# EAGLE board CC2541_Breakout_Board (EAGLE 6.1)
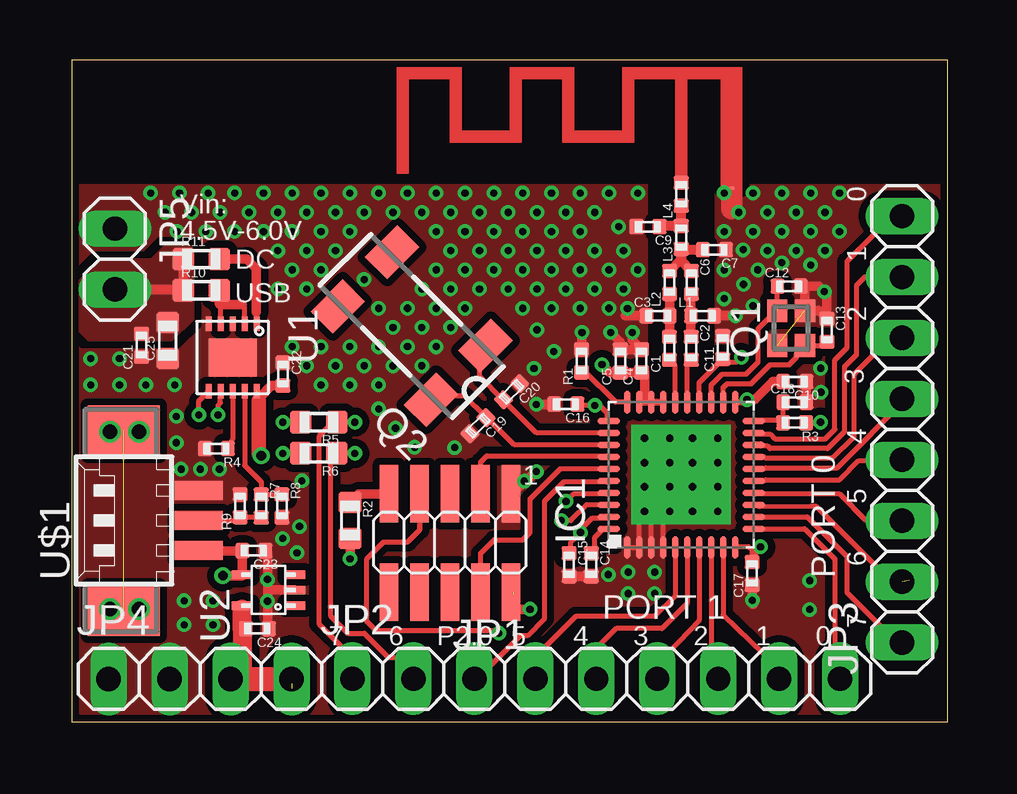
[diagram p0: board, top side]
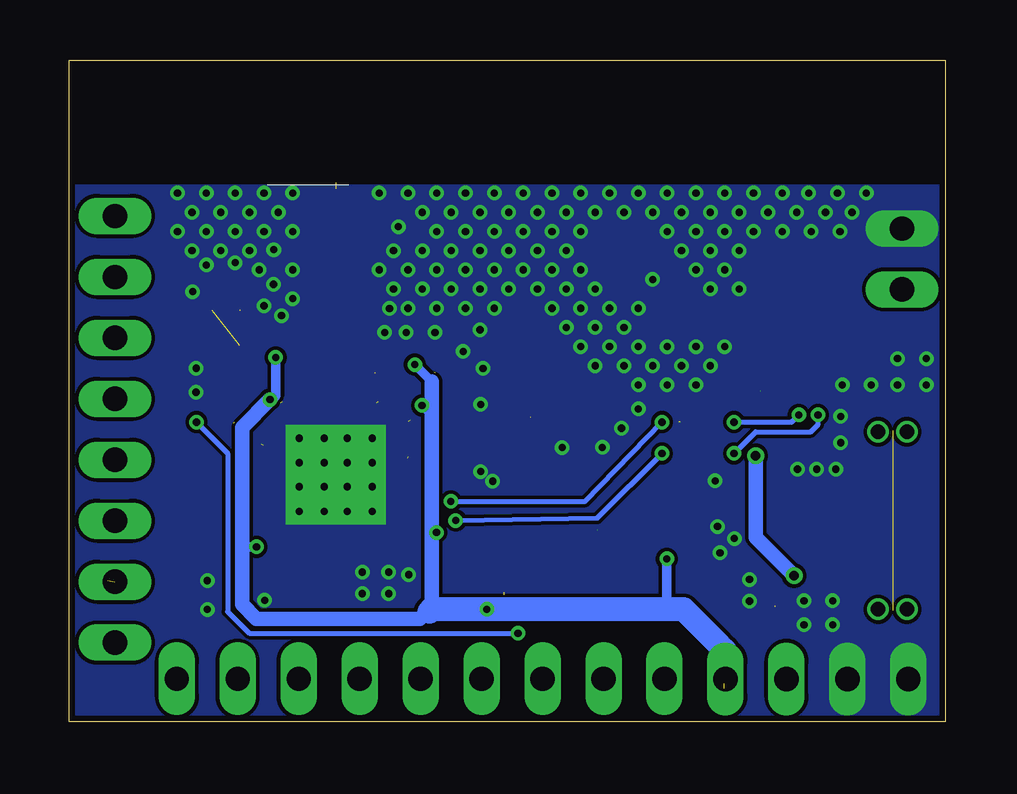
[diagram p1: board, bottom side, seen from below]

Size 36.5 x 27.6 mm. Coordinates in mm from the lower left corner, seen from the top.
Outline: 0,0 36.5,0 36.5,27.6 0,27.6 0,0
Copper layers (1*16): Top 0.035mm / dielectric 1.5mm / Bottom 0.035mm
Design rules: minimum track width 6mil, minimum drill 0.3mm, track to track 6mil, track to pad 6mil, pad to pad 6mil, via to via 6mil, smd to smd 0mil, copper to edge 10mil, drill to drill 10mil, minimum pad ring 10mil, minimum via ring 6mil, stop-mask expansion 2mil, vias tented up to drill 100mil, thermal gap 10mil

## Footprints (pad centres in the part's own frame; a part is rotated, then mirrored left to right if it is on the bottom)
TI_2.4GHZ_MIFA_LEFT = smd 0.2 x 0.1: FEED 0,-0.06; GND 2.1,-0.06
C0402 = smd 0.59 x 0.64: 1 -0.48,0; 2 0.48,0
C0603 = smd 0.9 x 0.95: 1 -0.75,0; 2 0.75,0
QFN40-6X6 = smd 0.95 x 0.28: 1 -3.025,2.25; 2 -3.025,1.75; 3 -3.025,1.25; 4 -3.025,0.75; 5 -3.025,0.25; 6 -3.025,-0.25; 7 -3.025,-0.75; 8 -3.025,-1.25; 9 -3.025,-1.75; 10 -3.025,-2.25; 21 3.025,-2.25; 22 3.025,-1.75; 23 3.025,-1.25; 24 3.025,-0.75; 25 3.025,-0.25; 26 3.025,0.25; 27 3.025,0.75; 28 3.025,1.25; 29 3.025,1.75; 30 3.025,2.25 | smd 0.28 x 0.95: 11 -2.25,-3.025; 12 -1.75,-3.025; 13 -1.25,-3.025; 14 -0.75,-3.025; 15 -0.25,-3.025; 16 0.25,-3.025; 17 0.75,-3.025; 18 1.25,-3.025; 19 1.75,-3.025; 20 2.25,-3.025; 31 2.25,3.025; 32 1.75,3.025; 33 1.25,3.025; 34 0.75,3.025; 35 0.25,3.025; 36 -0.25,3.025; 37 -0.75,3.025; 38 -1.25,3.025; 39 -1.75,3.025; 40 -2.25,3.025 | drill 0.3 pad 1.1 square: EXP@1 -1.525,1.525; EXP@2 -0.5,1.525; EXP@3 0.5,1.525; EXP@4 1.525,1.525; EXP@5 -1.525,0.475; EXP@6 -0.5,0.475; EXP@7 0.5,0.475; EXP@8 1.525,0.475; EXP@9 -1.525,-0.475; EXP@10 -0.5,-0.475; EXP@11 0.5,-0.475; EXP@12 1.525,-0.475; EXP@13 -1.525,-1.525; EXP@14 -0.5,-1.525; EXP@15 0.5,-1.525; EXP@16 1.525,-1.525
2X05_1.27_SMD = smd 0.76 x 2.4: 1 -2.54,-2.05; 2 -2.54,2.05; 3 -1.27,-2.05; 4 -1.27,2.05; 5 0,-2.05; 6 0,2.05; 7 1.27,-2.05; 8 1.27,2.05; 9 2.54,-2.05; 10 2.54,2.05
1X09 = drill 1.016 long: 1 -10.16,0; 2 -7.62,0; 3 -5.08,0; 4 -2.54,0; 5 0,0; 6 2.54,0; 7 5.08,0; 8 7.62,0; 9 10.16,0
1X08 = drill 1.016 long: 1 -8.89,0; 2 -6.35,0; 3 -3.81,0; 4 -1.27,0; 5 1.27,0; 6 3.81,0; 7 6.35,0; 8 8.89,0
1X04 = drill 1.016 long: 1 -3.81,0; 2 -1.27,0; 3 1.27,0; 4 3.81,0
1X02 = drill 1.016 long: 1 -1.27,0; 2 1.27,0
FA-128 = smd 0.95 x 0.85: 1 -0.725,-0.575; 2 0.725,-0.575; 3 0.725,0.575; 4 -0.725,0.575
MC-306 = smd 1.3 x 1.9: 1 -2.75,-1.6; 2 2.75,-1.6; 3 2.75,1.6; 4 -2.75,1.6
LLP10 = smd 0.25 x 0.6: 1 -1,-1.4; 2 -0.5,-1.4; 3 0,-1.4; 4 0.5,-1.4; 5 1,-1.4; 6 1,1.4; 7 0.5,1.4; 8 0,1.4; 9 -0.5,1.4; 10 -1,1.4 | smd 2 x 1.6: EXP 0,0
SC70 = smd 0.35 x 0.85: 1 -0.65,-1.1; 2 0,-1.1; 3 0.65,-1.1; 4 0.65,1.1; 5 -0.65,1.1
53261-03 = smd 0.8 x 2: 1 1.25,-2.5; 2 0,-2.5; 3 -1.25,-2.5 | smd 2.1 x 3: S1 3.75,0.625; S2 -3.75,0.625

## Placement (x,y rotation side)
A1  TI_2.4GHZ_MIFALEFT  [TI_2.4GHZ_MIFA_LEFT]  25.4,22.3 0 top
C1  18p  [C0402]  24.91,15.58 90 top
C2  18p  [C0402]  25.82,15.58 270 top
C3  1p  [C0402]  24.43,16.93 0 top
C4  220p  [C0402]  23.75,15.05 90 top
C5  100n  [C0402]  22.86,15.05 90 top
C6  1p  [C0402]  25.82,18.32 270 top
C7  DNM  [C0402]  26.78,19.69 180 top
C9  1p  [C0402]  24.01,20.65 180 top
C10  100n  [C0402]  30.13,14.19 180 top
C11  100n  [C0402]  27.13,15.61 90 top
C12  12p  [C0402]  29.89,18.17 0 top
C13  12p  [C0402]  31.47,16.33 270 top
C14  1u  [C0402]  21.65,6.55 270 top
C15  1u  [C0402]  20.73,6.55 270 top
C16  100n  [C0402]  20.59,13.25 180 top
C17  C0402  [C0402]  28.35,6.19 90 top
C18  100n  [C0402]  30.13,13.33 0 top
C19  15p  [C0402]  16.93,12.35 225 top
C20  15p  [C0402]  18.33,13.77 225 top
C21  4.7u  [C0402]  2.91,15.71 90 top
C22  1u  [C0402]  8.8,14.5 270 top
C23  100n  [C0402]  7.59,7.14 180 top
C24  470n  [C0402]  7.74,3.88 180 top
C25  C0603  [C0603]  4,15.9 90 top
IC1  CC2540  [QFN40-6X6]  25.39,10.3 90 top
JP1  [2X05_1.27_SMD]  15.77,7.46 180 top
JP2  [1X09]  21.86,1.8 0 top
JP3  [1X08]  34.6,12.2 90 top
JP4  [1X04]  5.35,1.79 0 top
JP5  [1X02]  1.8,19.3 270 top
L1  2n  [C0402]  26.29,16.93 0 top
L2  2n  [C0402]  24.91,18.32 90 top
L3  1n  [C0402]  25.4,20.2 90 top
L4  3n  [C0402]  25.4,22 90 top
Q1  FA-128  [FA-128]  29.98,16.42 90 top
Q2  MC-306  [MC-306]  14.16,16.51 135 top
R1  56k  [C0402]  21.25,15.05 90 top
R2  R0603  [C0603]  11.6,8.4 270 top
R3  2.7k  [C0402]  30.12,12.47 180 top
R4  ?  [C0402]  6.03,11.39 180 top
R5  R0603  [C0603]  10.3,12.5 180 top
R6  R0603  [C0603]  10.3,11.2 180 top
R7  0  [C0402]  7.9,9 270 top
R8  10k  [C0402]  8.76,9 270 top
R9  10k  [C0402]  7.02,9.01 90 top
R10  R0603  [C0603]  5.4,18 0 top
R11  R0603  [C0603]  5.4,19.3 0 top
U1  LM3658  [LLP10]  6.71,15.2 180 top
U2  TPS71530  [SC70]  8.2,5.5 90 top
U$1  53261-0371  [53261-03]  2.8,8.4 90 top

## Library data of the parts
A1 = antennas
C1-C7 C9-C25 L1-L4 R1-R11 = smd-ipc
IC1 U2 = texas
JP1-JP5 = pinhead
Q1 = crystal
Q2 = crystal; MPN: MC-306 60.0KHZ 100PPM ,12.5PF; OC_FARNELL: 1278040; OC_NEWARK: 31M5576
U1 = national-semiconductor
U$1 = con-molex

## Nets
CONNECTOR_MOUNT: U$1.S1 U$1.S2
GND: A1.GND C3.1 C4.2 C5.2 C7.1 C9.2 C10.1 C11.2 C12.2 C13.1 C14.2 C15.2 C16.2 C17.1 C18.2 C19.2 C20.1 C21.1 C22.1 C23.1 C24.1 C25.1 IC1.1 IC1.2 IC1.3 IC1.4 IC1.EXP@1 IC1.EXP@2 IC1.EXP@3 IC1.EXP@4 IC1.EXP@5 IC1.EXP@6 IC1.EXP@7 IC1.EXP@8 IC1.EXP@9 IC1.EXP@10 IC1.EXP@11 IC1.EXP@12 IC1.EXP@13 IC1.EXP@14 IC1.EXP@15 IC1.EXP@16 JP1.1 JP4.1 JP4.2 JP5.1 L1.2 Q1.2 Q1.4 R1.2 R4.2 R8.2 R9.2 U1.3 U1.5 U1.EXP U2.2 U$1.1
N$1: C1.1 IC1.26
N$2: C2.2 IC1.25
N$3: C1.2 C3.2 L2.1
N$4: C2.1 C6.2 L1.1
N$5: C6.1 C7.2 L2.2 L3.1
N$6: C9.1 L3.2 L4.1
N$7: IC1.30 R1.1
N$8: C13.2 IC1.22 Q1.1
N$9: C12.1 IC1.23 Q1.3
N$10: C14.1 IC1.40
N$11: JP1.7 R3.1
N$12: JP1.9 R2.1
N$13: IC1.34 JP1.3
N$14: IC1.35 JP1.4
N$15: C18.1 IC1.20 R3.2
N$16: C20.2 IC1.32 Q2.1
N$17: C19.1 IC1.33 Q2.4
N$18: IC1.19 JP3.8
N$19: IC1.18 JP3.7
N$20: IC1.17 JP3.6
N$21: IC1.16 JP3.5
N$22: IC1.15 JP3.4
N$23: IC1.14 JP3.3
N$24: IC1.13 JP3.2
N$25: IC1.12 JP3.1
N$26: IC1.11 JP2.9
N$27: IC1.9 JP2.8
N$28: IC1.7 JP2.6
N$29: IC1.8 JP2.7
N$30: R10.2 U1.2 U1.4
N$31: IC1.6 JP2.5
N$32: IC1.38 JP2.2 R6.1
N$33: IC1.37 JP2.1 R5.1
N$34: R4.1 U1.8
N$35: C21.2 C25.2 JP5.2 R10.1 R11.1
N$36: C22.2 C23.2 U1.10 U2.4 U$1.3
N$37: R5.2 U1.7
N$38: R6.2 U1.6
N$39: IC1.36 JP2.3
N$40: R7.2 R9.1 U$1.2
N$41: R7.1 R8.1 U1.9
N$42: IC1.5 JP2.4
N$43: R11.2 U1.1
N$44: A1.FEED L4.2
NC2: U2.3
VDD: C4.1 C5.1 C10.2 C11.1 C15.1 C16.1 C17.2 C24.2 IC1.10 IC1.21 IC1.24 IC1.27 IC1.28 IC1.29 IC1.31 IC1.39 JP1.2 JP4.3 JP4.4 R2.2 U2.5

## Tracks (layer width: path | path; a pad name or v marks a point on that pad's centre or on a via)
CONNECTOR_MOUNT  (1 unrouted)
GND  (via drill 0.3)  (1 unrouted)
  Top 0.2: IC1.4 24.64,8.78 IC1.EXP@5 24.14,8.78 | IC1.3 24.14,8.78 | 24.14,8.78 23.64,8.78 IC1.2 IC1.1 | v28.36,5.07 28.36,5.66 28.4,5.7 28.39,5.71 C17.1
  Top 0.4: v19.36,10.44 18.33,9.54 JP1.1 | v19.36,13.24 C16.2 | v21.26,16.24 R1.2 | v23.36,16.24 23.36,15.93 C4.2 C5.2 22.86,15.84 v22.46,16.24 | C3.1 23.07,16.93 v23.16,17.24 | L1.2 v27.66,16.93 v27.66,16.94 | C12.2 31.13,18.17 v31.36,17.94 31.47,17.83 C13.1 31.14,17.14 Q1.2 30.55,18.05 30.6,18.1 | C17.1 28.35,5.05 28.3,5 28.4,4.9 | C15.2 C14.2 | C23.1 8.16,7.05 v8.16,5.94 | v8.16,5.94 v8.16,5.04 8.2,5 8.16,4.96 8.16,3.92 | U2.2 8.16,5.5 v8.16,5.94 | C18.2 30.6,14.1
  Top 0.9: A1.GND 27.5,21.4
  other vias: 31.21,14.75 19.26,14.74 27.98,19.69 22.79,20.65 4.56,10.54 5.36,10.54 5.36,10.54 6.16,10.54 15.96,11.44 31.22,13.75 22.36,6.14 23.59,22.05 22.39,22.05 21.19,22.05 5.69,22.05 4.49,22.05 3.29,22.05 10.39,20.45 9.19,20.45 7.99,20.45 17.59,20.45 16.39,20.45 15.19,20.45 18.19,21.25 16.99,21.25 15.79,21.25 16.39,22.05 15.19,22.05 13.99,22.05 19.99,22.05 18.79,22.05 17.59,22.05 21.79,21.25 20.59,21.25 19.39,21.25 29.59,22.05 28.39,22.05 27.19,22.05 31.99,22.05 30.79,22.05 30.79,20.45 29.59,20.45 28.39,20.45 27.19,20.45 31.39,21.25 22.99,19.65 23.59,18.85 30.79,19.05 29.59,19.15 24.29,6.25 24.29,5.35 23.19,5.35 23.19,6.25 31.39,19.65 30.19,19.65 28.99,19.65 27.19,18.85 27.99,18.25 27.19,17.65 28.59,18.85 28.39,17.35 30.19,21.25 28.99,21.25 27.79,21.25 30.75,5.89 30.75,4.69 5.89,4.05 4.69,4.05 5.89,5.05 4.69,5.05 1.99,14.05 0.79,14.05 4.29,14.05 3.09,14.05 1.99,15.15 0.79,15.15 12.79,14.05 11.59,14.05 10.39,14.05 10.99,14.85 9.79,14.85 11.59,15.65 10.39,15.65 9.19,15.65 14.59,14.85 13.39,14.85 12.19,14.85 15.19,15.65 13.99,15.65 12.79,15.65 15.79,16.45 14.59,16.45 13.39,16.45 15.19,17.25 13.99,17.25 12.79,17.25 18.79,17.25 16.39,17.25 22.39,17.25 21.19,17.25 19.99,17.25 20.59,18.05 19.39,18.05 18.19,18.05 22.99,18.05 21.79,18.05 22.39,18.85 21.19,18.85 19.99,18.85 21.79,19.65 20.59,19.65 19.39,19.65 21.19,20.45 19.99,20.45 18.79,20.45 18.79,18.85 17.59,18.85 16.39,18.85 15.19,18.85 12.19,18.45 18.19,19.65 16.99,19.65 15.79,19.65 16.99,18.05 15.79,18.05 14.59,18.05 9.79,18.05 8.59,18.05 10.39,18.85 9.19,18.85 10.99,19.65 9.79,19.65 8.59,19.65 11.59,20.45 14.59,21.25 13.39,21.25 12.19,21.25 12.79,22.05 11.59,22.05 10.39,22.05 10.99,21.25 9.79,21.25 8.59,21.25 9.19,22.05 7.99,22.05 6.79,22.05 7.39,21.25 6.19,21.25 4.99,21.25 6.79,20.45 5.59,20.45 4.39,20.45 19.39,16.35 20.09,15.45 31.99,20.45 18.86,10.04 9.39,7.05 8.79,7.65 9.49,8.15 9.59,10.05 12.79,13.05 13.49,12.25 14.29,11.45 4.36,12.74 4.36,11.64 3.89,21.25
  pour Bottom (no thermals): 36.5,22.4 0,22.4 0,0 36.5,0
  pour Top (isolate 0.305, rank 6, no thermals): 24,22.4 0,22.4 0,0 36.5,0 36.5,22.4 26.8,22.4 26.8,13.7 24,13.7
N$1
  Top 0.2: IC1.26 25.14,14.86 C1.1
N$2
  Top 0.2: IC1.25 25.64,14.93 C2.2
N$3
  Top 0.4: L2.1 C3.2 C1.2
N$4
  Top 0.4: C6.2 25.8,17.82 L1.1 25.8,16.07 C2.1
N$5
  Top 0.4: L2.2 25.4,19.29 25.4,19.3 | C6.1 25.39,19.23
  Top 0.406: 25.4,19.7 L3.1 25.4,19.23 25.39,19.23 | 25.4,19.7 25.4,19.3 | 25.4,19.7 C7.2
N$6
  Top 0.406: C9.1 24.49,20.68 L3.2 L4.1
N$7  (1 unrouted)
  Top 0.2: IC1.30 22.67,13.33 21.4,14.6 21.3,14.6
N$8
  Top 0.2: IC1.22 27.14,13.95 27.3,14.1 28.3,14.1 29.1,14.9 29.9,14.9 30.2,15.2 30.2,15.35 Q1.1 31.32,15.7 C13.2
N$9  (1 unrouted)
  Top 0.2: IC1.23 26.64,14.04 27.1,14.5 28.1,14.5 28.6,15 28.6,16.4 29.4,17.2 | Q1.3 C12.1
N$10
  Top 0.2: C14.1 21.8,7.18 21.8,7.7 22.16,8.05 IC1.40
N$11  (via drill 0.3)  (1 unrouted)
  Top 0.2: R3.1 31.27,12.47 v31.2,12.5 | JP1.7 14.49,8.01 | v17.8,3.7 17.6,3.8 12.7,3.8 12.3,4.2 12.3,6.8 13,7.5 14,7.5 14.5,8 14.5,8.2
  Bottom 0.2: v17.8,3.7 29,3.7 29.9,4.6 29.9,11.2 v31.2,12.5
N$12
  Top 0.4: JP1.9 11.96,9.52 R2.1
N$13  (1 unrouted)
  Top 0.2: JP1.3 17.04,10.84 17.3,11.1 22.3,11.1 22.4,11
N$14
  Top 0.2: JP1.4 17.04,7.04 17.6,7.6 18.8,7.6 19.1,7.9 19.1,9.3 20.36,10.55 IC1.35
N$15  (1 unrouted)
  Top 0.2: 28.42,12.5 IC1.20 28.46,12.6 29.6,12.6 29.6,12.5 | 29.6,12.4 29.6,12.5 | 29.6,12.5 29.7,12.5 | R3.2 C18.1
N$16
  Top 0.2: IC1.32 19.37,12.05 C20.2 17,14.42 17,15.2 17.24,15.44 Q2.1
N$17  (1 unrouted)
  Top 0.2: IC1.33 18.45,11.55 17.3,12.7 | C19.1 16.36,13.6 15.7,13.6 15.53,13.43 Q2.4
N$18
  Top 0.2: IC1.19 28.48,12 29.1,12 29.3,11.8 31.4,11.8 31.8,12.2 31.8,15.1 32.3,15.6 32.3,19.2 34.19,21.09 JP3.8
N$19  (1 unrouted)
  Top 0.2: JP3.7 33.05,18.55 32.7,18.2 32.7,15.3 32.2,14.8 32.2,12.1 31.5,11.4 29.1,11.4 29,11.5 28.7,11.5 28.7,11.6 28.5,11.6
N$20
  Top 0.2: IC1.17 28.84,11.05 28.9,11 31.7,11 32.6,11.9 32.6,14.5 34.1,16 34.99,16 JP3.6
N$21
  Top 0.2: IC1.16 28.86,10.55 28.9,10.6 31.9,10.6 34.8,13.5 35,13.5 | 35,13.5 35.2,13.5 | JP3.5 35,13.5
N$22
  Top 0.2: IC1.15 28.86,10.05 28.9,10.1 32,10.1 32.8,10.9 34.97,10.9 JP3.4
N$23
  Top 0.2: JP3.3 33.11,8.39 32,9.5 28.48,9.5 IC1.14
N$24  (1 unrouted)
  Top 0.2: IC1.13 28.66,8.98 30.8,9 31,9 34.1,5.9 34.9,5.9 35,5.8
N$25
  Top 0.2: IC1.12 30.64,8.55 32.3,6.9 32.3,5.4 34.4,3.3 34.99,3.3 JP3.1
N$26
  Top 0.2: IC1.11 30.55,8.05 31.8,6.8 31.8,2.02 JP2.9
N$27
  Top 0.2: IC1.9 27.14,4.46 29.4,2.3 29.4,1.88 JP2.8
N$28
  Top 0.2: IC1.7 26.14,4.25 24.4,2.4 JP2.6
N$29
  Top 0.2: IC1.8 26.64,2 JP2.7
N$30
  Top 0.2: U1.4 6.21,17.39 6.2,17.4 | U1.2 7.21,17.29 7.1,17.4
  Top 0.4: R10.2 6.15,17.45 6.2,17.4 7.1,17.4
N$31
  Top 0.2: IC1.6 25.64,4.95 24.6,3.9 22.7,3.9 21.8,3 21.8,1.86 JP2.5
N$32  (via drill 0.3)
  Top 0.2: IC1.38 21.45,9.05 20.8,8.4 v20.4,8.4 | v11.8,11.2 R6.1 11,11.15 11,11.1 10.8,10.9 10.8,4.4 11.5,3.7 12.2,3.7 13.2,2.7 13.6,2.7 13.74,2.56 14.24,2.56 JP2.2
  Bottom 0.2: v20.4,8.4 14.5,8.5 v11.8,11.2
N$33  (via drill 0.3)  (1 unrouted)
  Top 0.2: IC1.37 22.32,9.5 20.9,9.5 v20.6,9.2 | v11.8,12.5 11.1,12.5 | R5.1 10.9,12.5 10.3,11.9 10.3,4.1 11.7,2.7 JP2.1
  Bottom 0.2: v20.6,9.2 15,9.2 v11.8,12.5
N$34
  Top 0.2: U1.8 6.71,11.79 R4.1
N$35
  Top 0.4: JP5.2 4.57,18.03 4.6,18 | R10.1 R11.1
  pour Top (no thermals): 0.3,18 0.3,16.3 0.7,15.9 4.2,15.9 5.1,16.8 5.1,19.7 4.9,19.9 3.9,19.9 3.3,19.3 1.2,19.3 0.3,18.4
N$36  (via drill 0.4)  (1 unrouted)
  Top 0.2: U1.10 7.71,13.49 7.8,13.4 | 7.9,13.6 U1.10
  Top 0.4: U$1.3 5.35,7.1 6,7.1 6.04,7.14 C23.2 | C23.2 U2.4 7.1,6.1 | C23.2 7.1,6.1 | 7.1,6.1 v6.3,6.1 | C22.2 8.32,14.02 7.9,13.6 | 7.8,11.2 v7.9,11.1
  Top 0.6: 7.8,13.4 7.8,11.2
  Bottom 0.6: v6.3,6.1 7.9,7.7 v7.9,11.1
N$37  (via drill 0.3)
  Top 0.2: R5.2 v8.8,12.5 | v6.1,12.8 6.1,13.2 6.2,13.3 U1.7
  Bottom 0.2: v8.8,12.5 6.4,12.5 v6.1,12.8
N$38  (via drill 0.3)
  Top 0.2: R6.2 v8.8,11.2 | v5.3,12.8 5.3,13.38 U1.6
  Bottom 0.2: v8.8,11.2 7.9,12.1 5.6,12.1 5.3,12.4 v5.3,12.8
N$39
  Top 0.2: IC1.36 22.32,10 20.5,10 19.7,9.2 19.7,4.3 19,3.6 18.7,3.6 16.9,1.8 JP2.3
N$40
  Top 0.2: U$1.2 7,8.4 7,8.53 R9.1 R7.2
N$41
  Top 0.2: R8.1 R7.1 7.9,10 7.21,10.69 U1.9
N$42
  Top 0.2: IC1.5 25.14,5.25 24.3,4.4 21,4.4 19.3,2.7 19.3,1.82 JP2.4
N$43
  Top 0.2: U1.1 7.71,17.09 7.7,17.1
  Top 0.4: R11.2 7.3,19.3 7.7,18.9 7.7,17.1
N$44  (1 unrouted)
N$45  (via drill 0.6)
  other vias: 1.6,12.1
N$46  (via drill 0.6)
  other vias: 2.8,12.1
N$47  (via drill 0.6)
  other vias: 1.6,4.7
N$48  (via drill 0.6)
  other vias: 2.8,4.7
VDD  (via drill 0.3)  (7 unrouted)
  Top 0.2: 27.7,13.4 27.7,13.3 27.6,13.4 | IC1.24 26.14,14.14 27,15 | 27,15 27.7,15 v27.9,15.2 | C11.1 27,15 | 27,15 27,15.1 | 23.77,14.57 23.87,14.6 | 23.87,13.4 23.7,13.3 24.11,13.3 IC1.28 | v28.7,7.3 28.34,6.77 C17.2 28.35,7.15 28.2,7.3 27.66,7.3 IC1.10 | IC1.39 22.32,8.5 21.7,8.5 21.2,8 v21.2,7.9 20.8,7.5 20.8,7.1 | 21.12,13.2 21.1,13.2 21.07,13.23 C16.1 21.12,13.2 | 22.3,12.6 22.3,12.9 22,13.2 v21.8,13.2 21.12,13.2 | 20.8,7.1 C15.1 20.7,7 20.8,7 20.8,7.1
  Top 0.254: IC1.21 28.14,13.33 v28.14,13.44
  Top 0.3: IC1.28 IC1.27
  Top 0.4: C5.1 23.77,14.57 | 23.87,14.6 23.87,13.4 | C4.1 22.43,14.57 v22.1,14.9 | R2.2 v11.6,6.8 | 7.1,4.7 7.2,4.8 7.1,4.8 | JP4.3 7.1,1.79 | v28.14,13.44 28.46,13.44 29.21,14.19 C10.2 | 7.1,3.88 C24.2 7.2,3.94 7.1,3.94 | v19.1,4.7 18.3,4.7 18.3,5.3 18.4,5.3 | 18.4,5.4 18.3,5.4 JP1.2
  Top 0.8: 7.1,3.94 7.1,4.7 | 7.1,3.88 7.1,1.79
  Top 1: 7.1,1.79 JP4.4
  Bottom 0.2: v21.2,7.9 21.4,8.1 | 21.4,14.2 21.5,14.1 21.5,13.5 v21.8,13.2
  Bottom 0.254: 28.1,13.4 28.14,13.4 v28.14,13.44
  Bottom 0.4: v28.7,7.3 29.3,7.3 | 21.4,5.3 21.4,4.8 | 21.4,12.8 v21.8,13.2 | 21.4,14.2 v22.1,14.9 | v27.9,15.2 27.9,13.6 28.1,13.4 | 9.45,3.25 9.2,3 | 9.2,1.3 9.2,1.4 9.19,1.39 JP4.4 | v11.6,6.8 11.6,4.7
  Bottom 0.6: 21.4,4.8 21.9,4.3 28.7,4.3 29.3,4.9 29.3,7.3 29.3,12.28 v28.14,13.44 | 21.4,14.2 21.4,8.1 21.4,5.3 21.4,4.7
  Bottom 1: 9.2,3 9.2,1.6 | 9.45,3.25 10.9,4.7 11.6,4.7 v19.1,4.7 21.4,4.7 21.5,4.6

## Text on the board
tSilk: 0 | Vin: | 4.5V-6.0V | DC | 1 | USB | 2 | 3 | 4 | 1 | 5 | PORT 0 | 6 | PORT 1 | 7 | 7 | 6 | P2.0 | 5 | 4 | 3 | 2 | 1 | 0